# Altium PCB 1025_power.PcbDoc
Units mil, origin at the board's own origin, x right, y up, seen from the top; angles counter-clockwise.
Board outline 3611.03 x 821.03 mil, 2 copper layers (Top Layer, Bottom Layer); 28 components, 51 nets, 74 pads, 0 vias.
Unrouted connection lines stored in the file: 6.
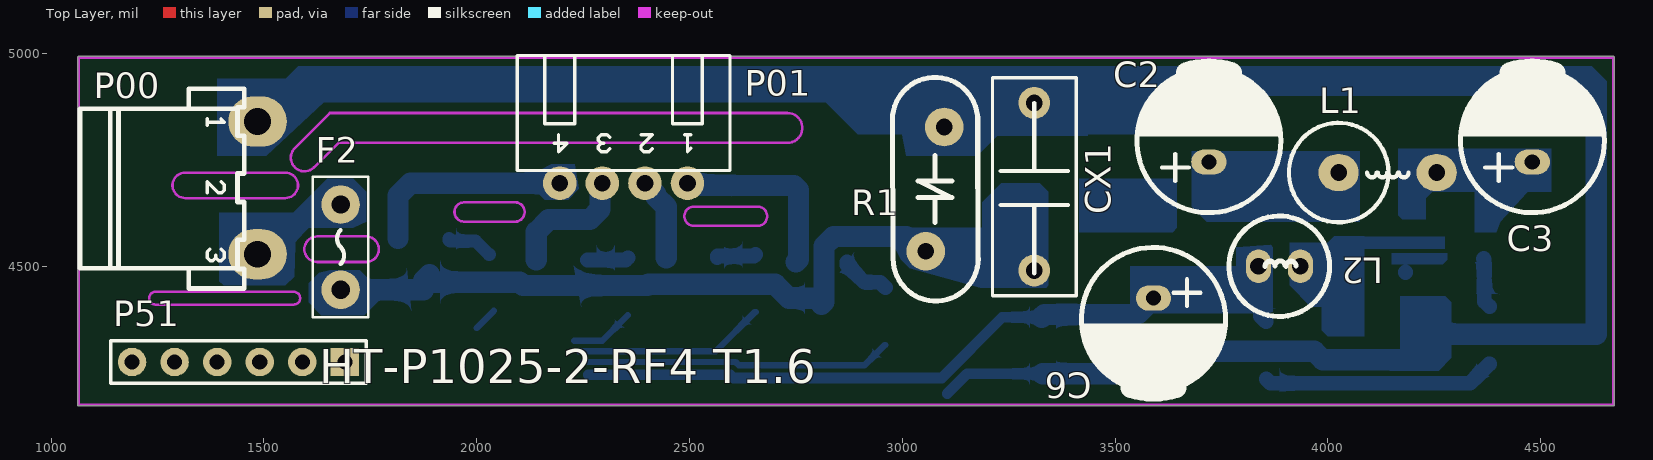
[diagram p0: Top Layer view]
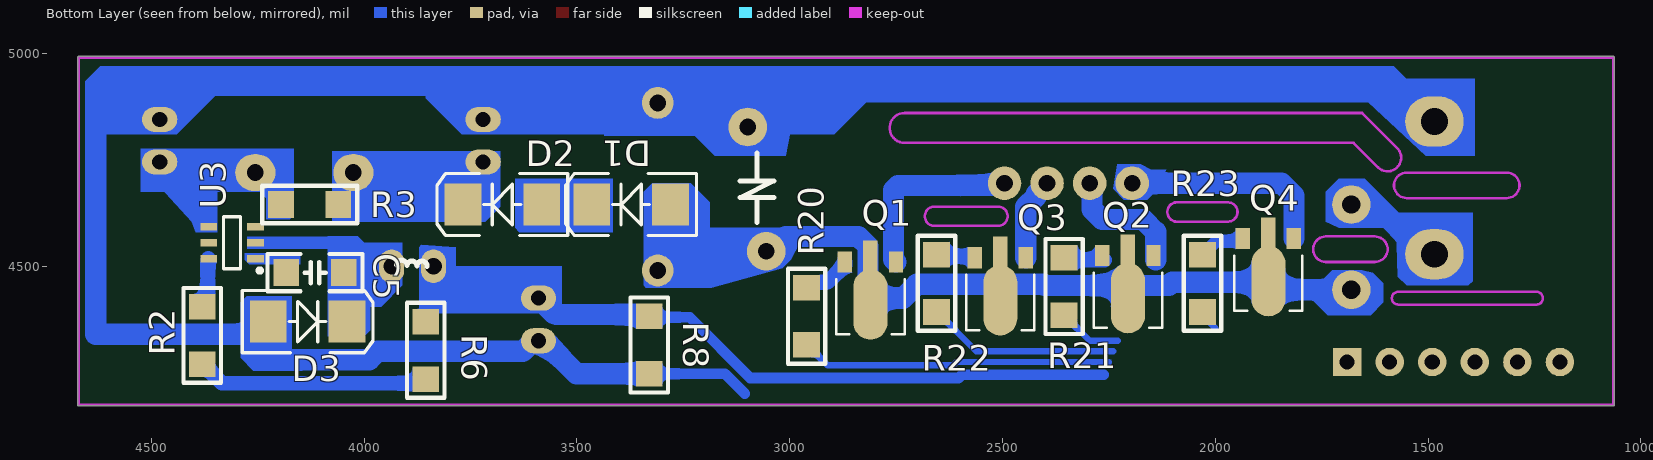
[diagram p1: Bottom Layer view, seen from below]

## Layer stack, top to bottom
Top Solder: solder mask 0.4, Solder Resist, Dk 3.5
Top Layer: signal copper 1.4
Dielectric 1: dielectric 12.6, FR-4, Dk 4.8
Bottom Layer: signal copper 1.4
Bottom Solder: solder mask 0.4, Solder Resist, Dk 3.5

## Board outline
1065,4171.98 cw(c1065,4175) 1061.98,4175 1061.98,4990 cw(c1065,4990) 1065,4993.02 4670,4993.02 cw(c4670,4990) 4673.02,4990 4673.02,4175 cw(c4670,4175) 4670,4171.98

## Design rules (kind name [scope] priority, off if disabled: settings)
Clearance [All] p1: gap=10 ignorepadtopadclearanceinfootprint=FALSE except(0: Arc-Hole Track-Hole SMDPad-Hole THPad-Hole Via-Hole Fill-Hole Poly-Hole Region-Hole Text-Hole)
ComponentClearance [All] p1 off: gap=10 collisioncheckmode=3 verticalgap=10 showdistances=FALSE
PolygonConnect [All] p1: connectstyle=Relief reliefconductorwidth=10 reliefentries=4 polygonreliefangle="90 Angle" airgapwidth=10
RoutingVias [All] p1: holewidth=28 width=50 viastyle="Through Hole" minholewidth=28 minwidth=50 maxholewidth=28 maxwidth=50
SolderMaskExpansion [All] p1: expansion=4
Width [All] p1: maxlimit=100 minlimit=10 preferedwidth=50
29 further rules are at their usual default settings.

## Components (designator, comment, footprint, x,y, rotation, side; value= is the part's Value field where it differs from the comment)
C2 "Cap" CAE8-3.05 3720,4795 r90 top value=2.2uF/400V
C3 "Cap" CAE8-3.05 4480,4795 r90 top value=2.2uF/400V
C5 "Cap" "C 1206_M" 4115,4485 r0 bottom value=10uF
C6 "Cap" CAE8-3.05 3590,4375 r270 top value=470uF/16V
CX1 "安规电容" CX2-13*5-10 3310,4686.85 r270 top value=0.22uF
D1 "M7" D3528 3372.48,4645 r0 bottom
D2 "M7" D3528 3675,4645 r0 bottom
D3 "ES1J" D3528 4132.52,4370 r180 bottom
F2 "Fuse 1" FUSE5.08 1680,4645 r270 top
L1 "Inductor" L15_2 4320.28,4720 r0 top value=1mH
L2 "Inductor" L3 3945,4500 r90 top value=1mH
P00 "220V~" VH-3AW 1485,4840 r270 top
P01 "档位接口" XH-4AW 2495,4695 r180 top
P51 "电源板电源接口" HDR2.54-LI-6P 1440,4275 r180 top
Q1 "HST97A8" SOT-89 2750,4510 r0 bottom
Q2 "HST97A8" SOT-89 2145,4525 r0 bottom
Q3 "HST97A8" SOT-89 2445,4520 r0 bottom
Q4 "HST97A8" SOT-89 1815,4565 r0 bottom
R1 "10D471" ZNR7.5 3076.65,4681.06 r270 top
R2 "Res2" "R 1206-HP_M" 4380,4337.5 r270 bottom value=24K
R3 "Res2" "R 1206-HP_M" 4127.5,4645 r0 bottom value=1K
R6 "Res2" "R 1206-HP_M" 3855,4302.5 r90 bottom value=22K
R8 "Res2" "R 1206-HP_M" 3330,4315 r90 bottom value=510K
R20 "Res2" "R 1206-HP_M" 2960,4382.5 r90 bottom value=561
R21 "Res2" "R 1206-HP_M" 2355,4452.5 r90 bottom value=561
R22 "Res2" "R 1206-HP_M" 2655,4460 r90 bottom value=561
R23 "Res2" "R 1206-HP_M" 2030,4460 r90 bottom value=561
U3 "LP2601" SOT23-6L 4310,4555 r90 bottom

## Footprints (in the part's own frame and the unit in brackets; to place one, negate y for a bottom-side part, rotate by r counter-clockwise, add the part's x,y. Pads: shape width x height; smd on the part's side, far side on the other; paste and mask are expansions set on the pad)
"C 1206_M" [mil] "无极性贴片电容"
  rect 60x62.99 smd: 1(-67.5,0) 2(67.5,0)
  silkscreen extent -112,-44 112,44, body extent -63,-32 63,32, height 48
CAE8-3.05 [mm]
  oval 1.5x2.1 hole 0.9: 1(-1.27,0) 2(1.27,0)
  silkscreen extent -4.3,-4.3 4.3,4.3
CX2-13*5-10 [mm]
  round 1.9 hole 1: 1(-5,0) 2(5,0)
  silkscreen extent -6.5,-2.5 6.5,2.5
D3528 [mm]
  rect 2.2x2.5 smd: A(-2.35,0) K(2.35,0)
  silkscreen extent -3.9,-1.85 3.9,1.85
FUSE5.08 [mm]
  round 2.3 hole 1.1: 1(0,0) 2(5.08,0)
  silkscreen extent -1.65,-1.65 6.73,1.65, body extent -1.65,-1.65 6.73,1.65, height 7.7
HDR2.54-LI-6P [mm] "排针，6脚"
  rect 1.7x1.7 hole 0.9: 1(-6.35,0)
  round 1.7 hole 0.9: 2(-3.81,0) 3(-1.27,0) 4(1.27,0) 5(3.81,0) 6(6.35,0)
  silkscreen extent -7.62,-1.27 7.62,1.27, body extent -7.62,-1.27 7.62,1.27, height 8.5
L3 [mm]
  oval 2x1.5 hole 1: 1(0,0.254) 2(0,2.746)
  silkscreen extent -3,-1.49 3,4.51
L15_2 [mm]
  oval 2.4x2.2 hole 1: 1(-7.5,0) 2(-1.651,0)
  silkscreen extent -10.47,-2.97 -3.33,2.97
"R 1206-HP_M" [mil] "1/4W高精度贴片电阻                    @sucaita.com 素材塔"
  rect 60x62.99 smd: 1(-67.5,0) 2(67.5,0)
  silkscreen extent -112,-44 112,44, body extent -63,-31 63,32, height 22
SOT23-6L [mm] "3x1.6x1.1mm(长宽高)"
  rect 0.45x1 smd: 1(-0.95,-1.397) 2(0,-1.397) 3(0.95,-1.397) 4(0.95,1.397) 5(0,1.397) 6(-0.95,1.397)
  silkscreen extent -1.77,-1.78 1.55,0.51, body extent -1.5,-1.4 1.5,1.4, height 1.15
SOT-89 [mil]
  rect 34.02x50 smd: 1(0,0) 3(120,0)
  rect 34x100 smd: 2(60,0)
  oval 80x165.35 smd: 2(60,100)
  silkscreen extent -20,40 140,170, body extent -31,-17 151,151, height 63
VH-3AW [mm]
  oval 3x3.5 hole 1.6: 1(0,0) 3(7.92,0)
  silkscreen extent -1.96,-10.6 9.96,-0.8
XH-4AW [mm]
  round 2 hole 1: 1(0,0) 2(2.54,0) 3(5.08,0) 4(7.62,0)
  silkscreen extent -2.54,-7.62 10.16,-0.76
ZNR7.5 [mm]
  round 2.3 hole 1: 1(-3.71,0.55) 2(3.71,-0.55)
  silkscreen extent -6.68,-2.54 6.68,2.58

## Part data
C2 C3 C6: library part "Cap Pol1", "Polarized Capacitor (Radial)", LatestRevisionDate=17-Jul-2002, LatestRevisionNote="Re-released for DXP Platform.", PackageDescription="Polarized Capacitor (Radial); 2 Leads", PackageReference=RB7.6-15, Published=8-Jun-2000, Publisher="Altium Limited"
C5: "Capacitor", LatestRevisionDate=17-Jul-2002, LatestRevisionNote="Re-released for DXP Platform.", PackageDescription="Radial Cap, Thru-Hole; 2 Leads; 0.3 in Pin Spacing", PackageReference=RAD-0.3, Published=8-Jun-2000, Publisher="Altium Limited"
CX1: library part Cap, "安规Capacitor", LatestRevisionDate=17-Jul-2002, LatestRevisionNote="Re-released for DXP Platform.", PackageDescription="Radial Cap, Thru-Hole; 2 Leads; 0.3 in Pin Spacing", PackageReference=RAD-0.3, Published=8-Jun-2000, Publisher="Altium Limited"
D1 D2: "整流二极管", BOM名称=Õ, 学习资源=https://shop463601444.taob, 版权归属=·â×
D3: library part M7, "快速二极管", BOM名称=Õ, 学习资源=https://shop463601444.taob, 版权归属=·â×
F2: "Fuse", LatestRevisionDate=17-Jul-2002, LatestRevisionNote="Re-released for DXP Platform.", PackageDescription="Thru-Hole; 2 Leads", PackageReference=PIN-W2/E2.8, Published=8-Jun-2000, Publisher="Altium Limited"
P00: library part "Header 2", "Header, 2-Pin", LatestRevisionDate=17-Jul-2002, LatestRevisionNote="Re-released for DXP Platform.", Publisher="Altium Limited"
P01: library part "Header 4", "Header, 4-Pin", LatestRevisionDate=17-Jul-2002, LatestRevisionNote="Re-released for DXP Platform.", Publisher="Altium Limited"
P51: library part "Header 6", "Header, 6-Pin", LatestRevisionDate=17-Jul-2002, LatestRevisionNote="Re-released for DXP Platform.", Publisher="Altium Limited"
Q1 Q2 Q3 Q4: library part Triac, "Silicon Bidirectional Triode Thyristor", ComponentLink1Description="Manufacturer Link", ComponentLink1URL=http://www.motorola.com/, DatasheetVersion=1999, LatestRevisionDate=17-Jul-2002, LatestRevisionNote="Re-released for DXP Platform.", Note="Pin 2 is electrically connected to Pin 4 (TAB)", PackageDescription="TO, Thru-Hole, Vertical, Heatsink Mounted; 3 In-Line Leads; Pitch 2.28 mm", PackageReference=369-03, Published=29-Sep-2000, Publisher="Altium Limited"
R1: library part "Res Varistor", "Varistor (Voltage-Sensitive Resistor)", Code_IPC=RESC2012, LatestRevisionDate=29-May-2009, LatestRevisionNote="IPC-7351 Footprint Added.", PackageDescription="Chip Resistor 0805 Case Size", PackageReference=6-0805, PackageVersion=Mar-2003, Published=24-Mar-1999, Publisher="Altium Limited"
R2 R3 R6 R8 R20 R21 R22 R23: "Resistor", LatestRevisionDate=17-Jul-2002, LatestRevisionNote="Re-released for DXP Platform.", PackageDescription="Axial Device, Thru-Hole; 2 Leads; 0.4 in Pin Spacing", PackageReference=AXIAL-0.4, Published=8-Jun-2000, Publisher="Altium Limited"
L1 L2: Code_IEC=1005, Code_JEITA=0402, LatestRevisionDate=29-May-2009, LatestRevisionNote="IPC-7351 Footprint Added.", PackageDescription="Chip Inductor", PackageReference=0402-A, Published=8-Jun-2000, Publisher="Altium Limited"

## Nets (pads, with @x,y where several pads share a name; then routed paths per layer and width w, separated by ;. In a path a pad name is that pad's centre, name@x,y a point inside that pad or via, vN(x,y) a via of type N, cw(c..) or ccw(c..) an arc to the next point about the centre after c; other vN are vias at no path point)
220VAC: CX1.2 D1.A F2.2 Q1.2 Q2.2 Q3.2 Q4.2 R1.2 | length 2055.1
  Bottom Layer w50: F2.2 1875,4445 1875,4465 1877.5,4462.5 2100.99,4462.5 2108.49,4455 2200,4455 2400.99,4455 2403.49,4457.5 2505,4457.5 2700.99,4457.5 2733.49,4425 2796.14,4425 2810,4411.14 2810,4410 2815.74,4415.74 2815.74,4510 2815.74,4547.25 2838.49,4570 3009.03,4570 3044.03,4535 R1.2 3258.29,4535 3303.29,4490 CX1.2 3310,4609.06 3279.96,4639.09 D1.A ; Q4.2@1875,4466.14 Q4.2@1878.86,4470 ; Q4.2@1888.86,4480 Q4.2@1878.86,4470 ; Q4.2@1895,4470 Q4.2@1878.86,4470
A: 
B: 
C: 
COM1: 
COM2: 
D: 
DP/NTC: 
DW1: P51.2 R20.1 | length 733.4
  Bottom Layer w15: 2249.53,4274.82 2249.78,4275.07 2607.98,4275.07 2615.61,4267.44 2910.95,4267.44 2958.5,4315 R20.1
DW2: P51.3 R22.1 | length 454.2
  Bottom Layer w15: 2239.17,4299.82 2239.42,4300.07 2561.08,4300.07 2653.5,4392.5 R22.1
DW3: P51.4 R21.1 | length 151.1
  Bottom Layer w15: 2228.82,4324.82 2229.07,4325.07 2295.07,4325.07 R21.1
E: 
F: 
G: 
GND: C2.2 C3.2 C6.2 CX1.1 D3.A P00.1 P51.6 R1.1 R8.1 | length 5525.1
  Bottom Layer w25: 3105,4200.5 3152,4247.5 R8.1
  Bottom Layer w50: P00.1 1470,4855 1515,4855 1590,4930 3098.31,4930 3098.31,4888.31 ; R1.1 3098.31,4888.31 ; R8.1 3500.69,4247.5 3578.19,4325 C6.2 3601.81,4325 3626.81,4300 3967.98,4300 3987.98,4280 4200,4280 4260,4340 4630,4340 4630,4825 4610,4845 C3.2 4468.19,4845 4373.19,4940 3826.81,4940 3731.81,4845 C2.2 3705.74,4845 3667.04,4883.7 CX1.1 3102.91,4883.7 3098.31,4888.31
LED_A: 
LED_B: 
LED_C: 
LED_D: 
LED_DP: 
LED_E: 
LED_F: 
LED_G: 
NEC_R: 
NetC2_1: C2.1 D2.K L1.1 R3.1 | length 140.6
  Bottom Layer w50: C2.1 3729.36,4745 3733.54,4740.82 3733.54,4731.46 3749.21,4715.79 3749.21,4663.31 D2.K ; L1.1 L1.1@4035.94,4730.94
NetC3_1: C3.1 L1.2 R3.2 U3.4 | length 432.5
  Bottom Layer w35: L1.2@4241.46,4733.81 L1.2 4365,4720 4436.68,4720 ; 4365,4605 4365,4705 4376.75,4716.75 4439.93,4716.75 4468.19,4745 C3.1
NetC5_1: C5.1 D3.K L2.1 U3.2 | length 348.2
  Bottom Layer w35: L2.1@3930.4,4495.4 L2.1 ; L2.1 3938,4503 4013,4503 4062.5,4552.5 4062.5,4501.5 4047.5,4486.5 C5.1 4040,4492.5 4013,4492.5 3942.5,4492.5 L2.1
NetC5_2: C5.2 U3.1 | length 1.5
  Bottom Layer w35: C5.2 C5.2@4182.5,4486.5
NetD1_K: D1.K D2.A | length 121
  Bottom Layer w35: D1.K D2.A
  Bottom Layer w50: D2.A@3559.94,4652.5 D2.A@3562.44,4655
NetF2_1: F2.1 P00.3 | length 243.4
  Bottom Layer w50: P00.3 1498.03,4541.22 1521.22,4541.22 1625,4645 F2.1
NetLS1_1: 
NetNEC2_1: 
NetP01_1: P01.1 Q1.1 | length 438.9
  Bottom Layer w50: P01.1 2500.5,4689.5 2745.5,4689.5 2755.74,4679.26 2755.74,4515.74 Q1.1
NetP01_2: P01.2 Q3.1 | length 195.7
  Bottom Layer w50: P01.2 2420.63,4669.37 2420.63,4664.19 2445,4639.82 Q3.1
NetP01_3: P01.3 Q2.1 | length 300.7
  Bottom Layer w50: Q2.1@2140,4515 2140,4580.71 2169.29,4610 2265.71,4610 2289.5,4633.79 2289.5,4689.5 P01.3
NetP01_4: P01.4 Q4.1 | length 500.6
  Bottom Layer w50: Q4.1 1815,4665.71 1844.29,4695 P01.4 P01.4@2195,4687.22
NetQ1_3: Q1.3 R20.2 | length 119
  Bottom Layer w35: Q1.3 2870,4502.99 2910.49,4462.5 2947.5,4462.5 R20.2
NetQ2_3: Q2.3 R21.2 | length 97.1
  Bottom Layer w35: Q2.3@2260,4515 2350,4515 R21.2
NetQ3_3: Q3.3 R22.2 | length 95
  Bottom Layer w35: Q3.3 2565,4523.26 2565.49,4523.75 2651.25,4523.75 R22.2
NetQ4_3: Q4.3 R23.2 | length 112.9
  Bottom Layer w30: Q4.3 1935,4561 1937.01,4559 1997.01,4559 2028.5,4527.5 R23.2
NetR2_1: R2.1 U3.6 | length 120.5
  Bottom Layer w35: U3.6@4366.04,4518.64 U3.6 4367.19,4515.41 4367.19,4417.5 4379.69,4405 R2.1
NetR2_2: R2.2 R6.1 | length 547.8
  Bottom Layer w35: R6.1 3865,4225 4333.5,4225 4378.5,4270 R2.2
TOUCH1: 
TOUCH2: 
TOUCH3: 
TOUCH4: 
TOUCH_LED_COM: 
UART_RX: 
UART_TX: 
VCC: C6.1 L2.2 P51.1 R6.2 R8.2 | length 1556.9
  Bottom Layer w25: 2261.95,4244.82 2262.21,4245.07 2595.56,4245.07 2603.19,4237.44 3092.44,4237.44 3235,4380 R8.2@3327.5,4380
  Bottom Layer w35: L2.2@3836.89,4490.16 L2.2 3841.49,4495.4 3841.49,4382.5 3853.99,4370 R6.2
  Bottom Layer w50: R8.2@3327.5,4380 R8.2 3334.13,4386.63 3548.56,4386.63 3551.46,4389.53 3554.53,4389.53 C6.1
YAOTOU: P51.5 R23.1 | length 56.6
  Bottom Layer w15: 2000,4355 R23.1@2040,4395
pads on no net: U3.3 U3.5

## Polygon pours and split planes (outlines as drawn)
no net on Bottom Layer "Bottom Layer-No Net" (solid, remove dead copper, pour order 0): 1395,4935

## Keep-outs
Keep-Out Layer:
  lines w6: 1617.5,4732.5 1675,4790 2730,4790 ccw(c2730,4825) 2730,4860 1655,4860 1570,4775 ccw(c1595,4755) 1617.64,4732.36 ; 2090,4605 ccw(c2090,4627.5) 2090,4650 ; 2095,4605 1970,4605 cw(c1970,4627.5) 1970,4650 2095,4650 ; 2660,4595 ccw(c2660,4617.5) 2660,4640 ; 2665,4595 2510,4595 cw(c2510,4617.5) 2510,4640 2665,4640 ; 1065,4175 1065,4990 4670,4990 4670,4175 1065,4175 ; 1245,4410 cw(c1245,4425) 1245,4440 1570,4440 cw(c1570,4425) 1570,4410 1245,4410 ; 1315,4660 cw(c1315,4690) 1315,4720 1550,4720 cw(c1550,4690) 1550,4660 1315,4660 ; 1625,4510 cw(c1625,4540) 1625,4570 1740,4570 cw(c1740,4540) 1740,4510 1625,4510

## Other copper
Bottom Layer:
  rectangle net NetC5_1: 4045,4540 4275,4570
  region net NetD1_K: 3415,4705 3415,4580 3635,4580 3645,4590 3645,4705
  region net NetC5_1: 4085,4570 4015,4570 4000,4555 3910,4555 3910,4455 3960,4405 3985,4405 3985,4350 4000,4335 4085,4335
  region net GND: 4170,4295 4170,4430 4275,4430 4290,4415 4290,4285 4260,4255 4145,4255
  region net 220VAC: 2957.5,4590 3187.5,4590 3187.5,4650 3232.5,4695 3322.5,4695 3342.5,4675 3342.5,4455 3337.5,4450 3182.5,4450 3017.5,4495 2997.5,4515
  region net NetP01_4: 2115.09,4726.57 2150.09,4726.57 2175.09,4739.81 2230.39,4739.81 2240.09,4681.57 2215.09,4656.57 2160.09,4656.57 2135.09,4681.57 2135.09,4691.57
  region net 220VAC: 1630,4485 1605,4460 1605,4415 1635,4385 1735,4385 1775,4425 1775,4440 1725,4490 1655,4490
  region net NetF2_1: 1555.64,4612.32 1648.32,4705 1710,4705 1740,4675 1740,4605 1710,4589.92 1600.15,4589.92
  region net VCC: 3870,4392.76 3870,4545 3865,4550 3785,4545 3785,4500 3535,4500 3535,4395 3540,4390 3860.45,4390
  region net NetC3_1: 4165,4776.61 4165,4620 4175,4610 4230,4610 4230,4660 4245,4675 4525,4675 4525,4776.61
  region net NetC2_1: 3680,4770 4075,4770 4075,4605 3715,4605 3680,4640
  region net GND: 1445,4930 1540,4930 1580,4970 4620,4970 4655,4935 4655,4815 4650,4810 4440,4810 4350,4900 3855,4900 3855,4895 3770,4810 2895,4810 2820,4885 1640,4885 1505,4760
  region net NetC3_1: 4345,4580 4395,4580 4405,4605 4515,4725 4345,4710
  region net NetC5_2: 4150,4530 4280,4530 4280,4515 4270,4505 4150,4505
  region net GND: 2977.5,4957.5 2992.5,4958.93 3460,4950 3435,4807.08 3222.5,4807.08 3175.42,4760 3008.56,4760 2977.5,4925
  region net NetF2_1: 1395,4625.82 1395,4465 1405,4455 1550,4455 1570.64,4475.64 1575.82,4625.82
  region net GND: 1570,4940 1390,4940 1390,4760 1505,4760 1567.45,4822.45 1567.45,4880.73

## Silkscreen, mask and mechanical layers (free items; w line width, h text height)
Top Overlay:
  text "HT-P1025-2-RF4 T1.6" at 1630,4225 h80